# EAGLE board eight envelopes (EAGLE 9.6.2)
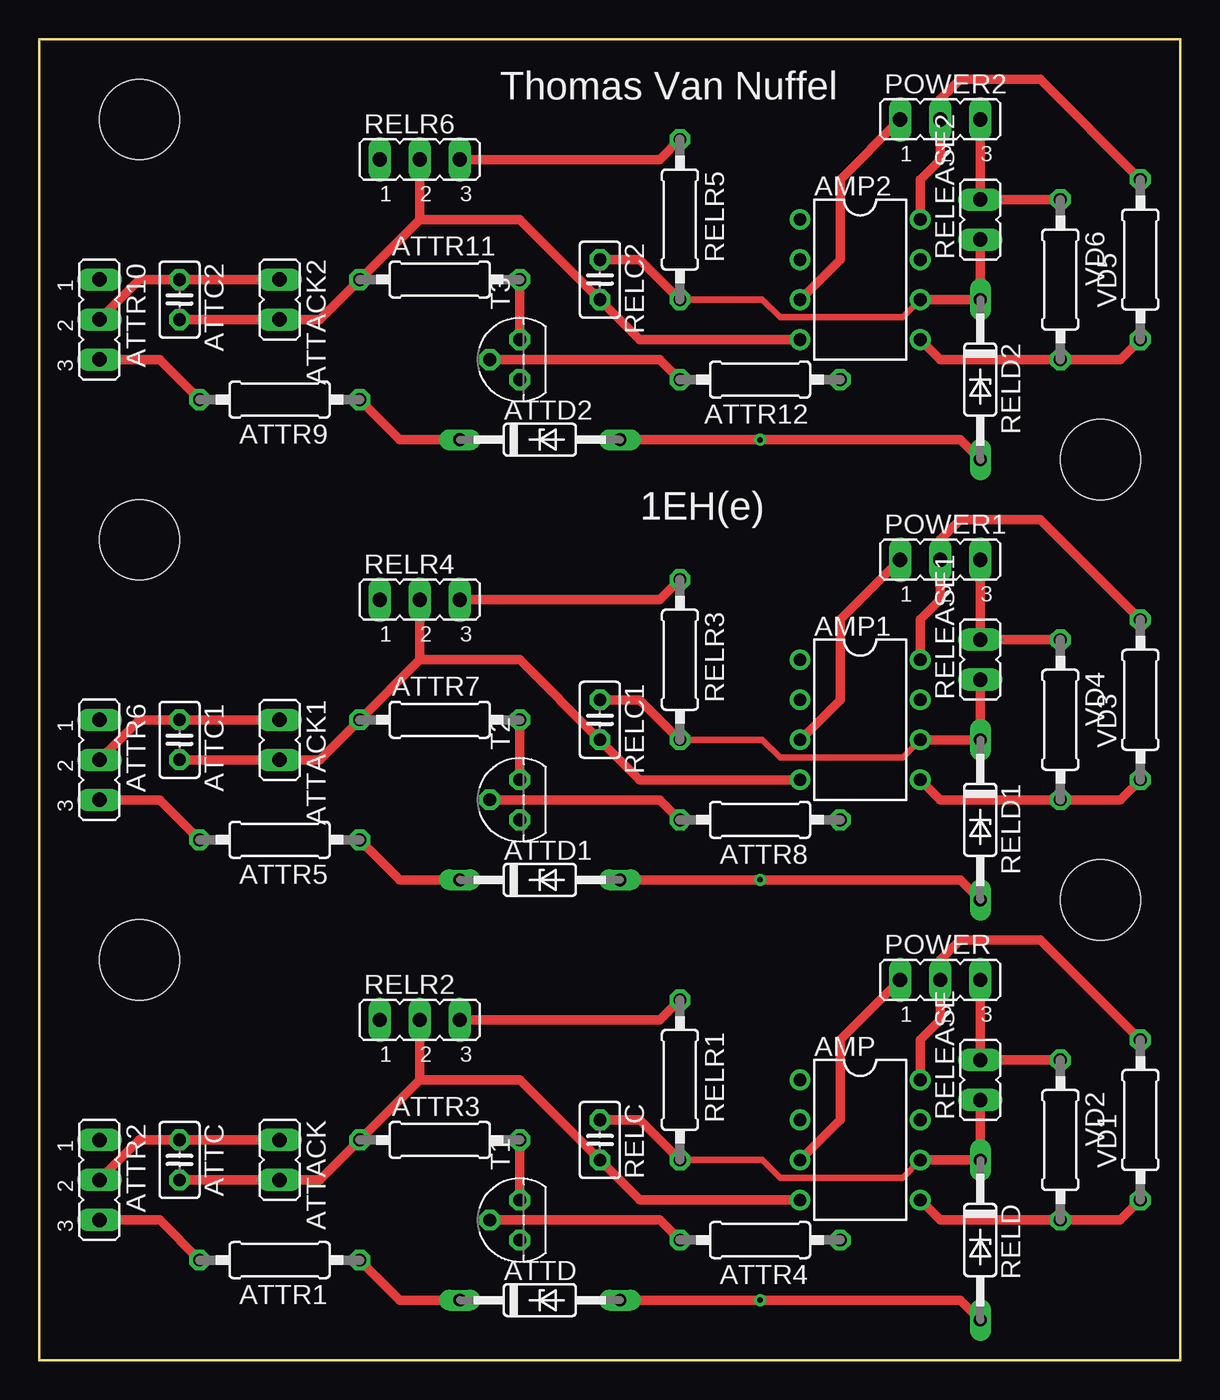
[diagram p0: board, top side]
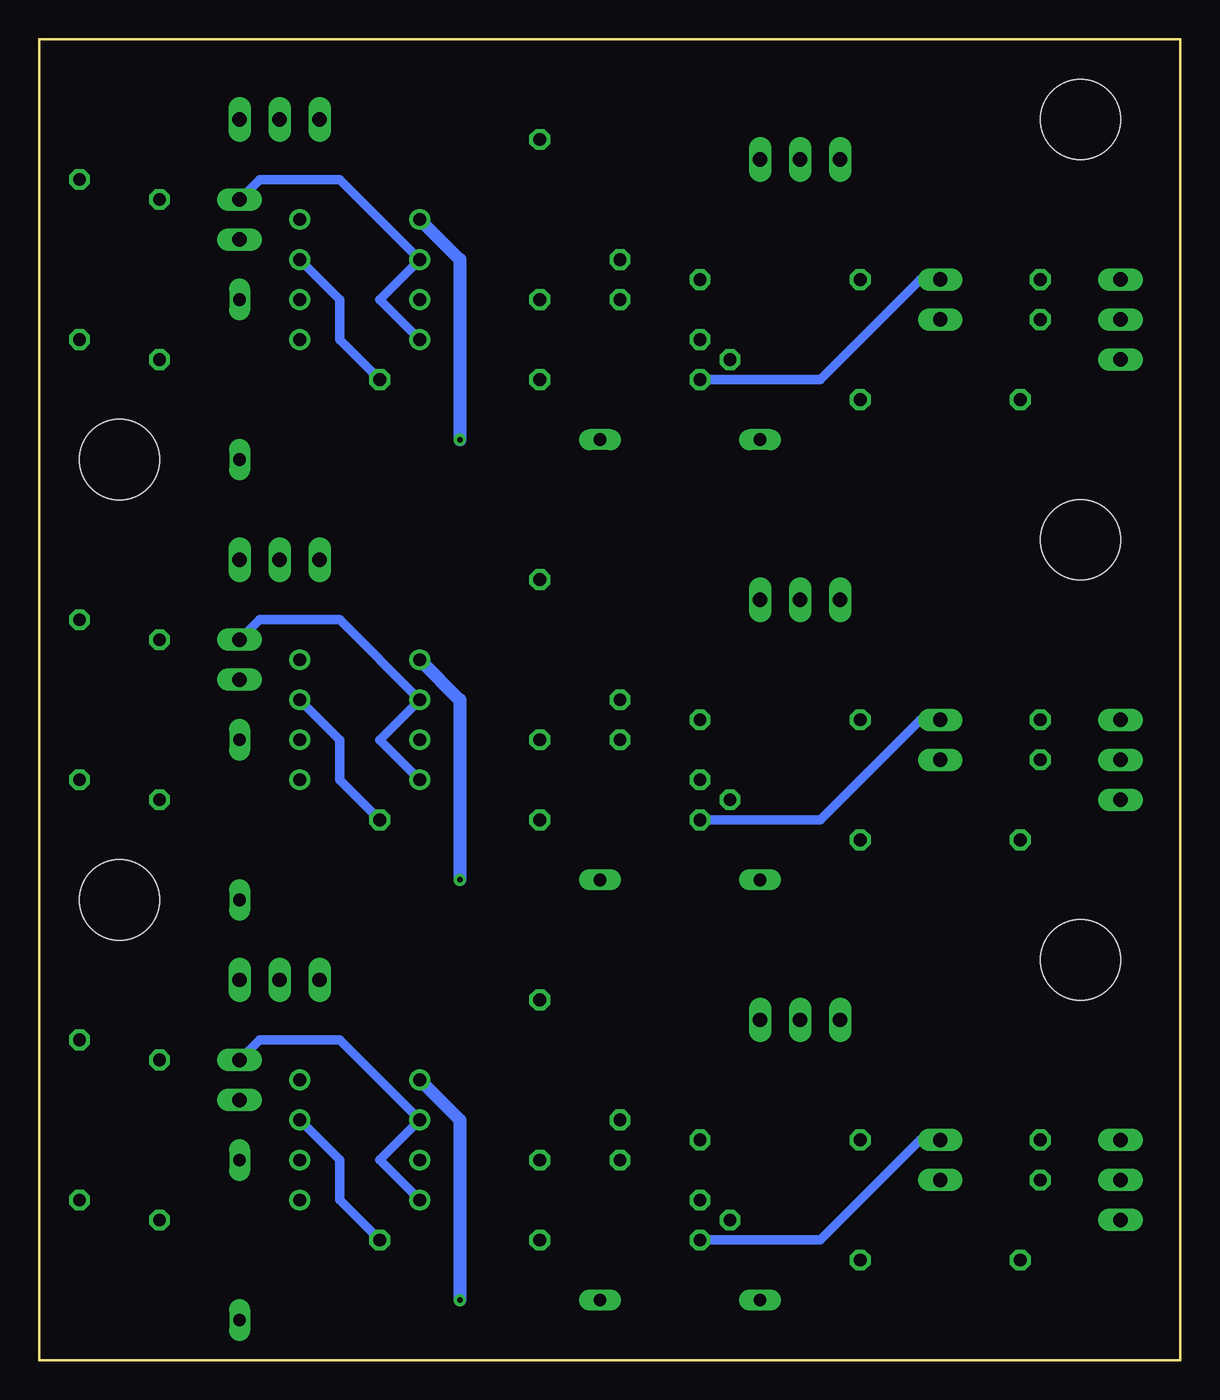
[diagram p1: board, bottom side, seen from below]

Size 72.39 x 83.82 mm. Coordinates in mm from the lower left corner, seen from the top.
Outline: 0,0 72.39,0 72.39,83.82 0,83.82 0,0
Copper layers (1*16): Top 0.035mm / dielectric 1.5mm / Bottom 0.035mm
Design rules "default": minimum track width 6mil, minimum drill 0.35mm, track to track 6mil, track to pad 6mil, pad to pad 6mil, via to via 6mil, smd to smd 6mil, copper to edge 40mil, drill to drill 6mil, minimum pad ring 10mil, minimum via ring 8mil, stop-mask expansion 4mil, vias tented up to drill 0mil, thermal gap 10mil
Holes 5.08 mm at 6.35,78.74 6.35,52.07 6.35,25.4 67.31,57.15 67.31,29.21

## Footprints (pad centres in the part's own frame; a part is rotated, then mirrored left to right if it is on the bottom)
DIL08 = drill 0.813 pad 1.27: 1 -3.81,-3.81; 2 -1.27,-3.81; 3 1.27,-3.81; 4 3.81,-3.81; 5 3.81,3.81; 6 1.27,3.81; 7 -1.27,3.81; 8 -3.81,3.81
JP1 = drill 0.914 long: 1 0,-1.27; 2 0,1.27
C025-025X050 = drill 0.813 octagon: 1 -1.27,0; 2 1.27,0
DO35Z10 = drill 0.813 long: A 5.08,0; C -5.08,0
0207/10 = drill 0.813 octagon: 1 -5.08,0; 2 5.08,0
JP2 = drill 0.914 long: 1 -2.54,0; 2 0,0; 3 2.54,0
TO92 = drill 0.813 octagon: 1 1.27,0; 2 0,1.905; 3 -1.27,0

## Placement (x,y rotation side)
AMP  LM358N  [DIL08]  52.07,13.97 270 top
AMP1  LM358N  [DIL08]  52.07,40.64 270 top
AMP2  LM358N  [DIL08]  52.07,68.58 270 top
ATTACK  [JP1]  15.24,12.7 180 top
ATTACK1  [JP1]  15.24,39.37 180 top
ATTACK2  [JP1]  15.24,67.31 180 top
ATTC  [C025-025X050]  8.89,12.7 270 top
ATTC1  [C025-025X050]  8.89,39.37 270 top
ATTC2  [C025-025X050]  8.89,67.31 270 top
ATTD  1N821  [DO35Z10]  31.75,3.81 0 top
ATTD1  1N821  [DO35Z10]  31.75,30.48 0 top
ATTD2  1N821  [DO35Z10]  31.75,58.42 0 top
ATTR1  [0207/10]  15.24,6.35 180 top
ATTR2  [JP2]  3.81,11.43 270 top
ATTR3  [0207/10]  25.4,13.97 0 top
ATTR4  [0207/10]  45.72,7.62 180 top
ATTR5  [0207/10]  15.24,33.02 180 top
ATTR6  [JP2]  3.81,38.1 270 top
ATTR7  [0207/10]  25.4,40.64 0 top
ATTR8  [0207/10]  45.72,34.29 180 top
ATTR9  [0207/10]  15.24,60.96 180 top
ATTR10  [JP2]  3.81,66.04 270 top
ATTR11  [0207/10]  25.4,68.58 0 top
ATTR12  [0207/10]  45.72,62.23 180 top
POWER  [JP2]  57.15,24.13 0 top
POWER1  [JP2]  57.15,50.8 0 top
POWER2  [JP2]  57.15,78.74 0 top
RELC  [C025-025X050]  35.56,13.97 270 top
RELC1  [C025-025X050]  35.56,40.64 270 top
RELC2  [C025-025X050]  35.56,68.58 270 top
RELD  1N821  [DO35Z10]  59.69,7.62 270 top
RELD1  1N821  [DO35Z10]  59.69,34.29 270 top
RELD2  1N821  [DO35Z10]  59.69,62.23 270 top
RELEASE  [JP1]  59.69,17.78 0 top
RELEASE1  [JP1]  59.69,44.45 0 top
RELEASE2  [JP1]  59.69,72.39 0 top
RELR1  [0207/10]  40.64,17.78 270 top
RELR2  [JP2]  24.13,21.59 0 top
RELR3  [0207/10]  40.64,44.45 270 top
RELR4  [JP2]  24.13,48.26 0 top
RELR5  [0207/10]  40.64,72.39 270 top
RELR6  [JP2]  24.13,76.2 0 top
T1  BC547  [TO92]  30.48,8.89 90 top
T2  BC547  [TO92]  30.48,35.56 90 top
T3  BC547  [TO92]  30.48,63.5 90 top
VD1  [0207/10]  69.85,15.24 90 top
VD2  [0207/10]  64.77,13.97 270 top
VD3  [0207/10]  69.85,41.91 90 top
VD4  [0207/10]  64.77,40.64 270 top
VD5  [0207/10]  69.85,69.85 90 top
VD6  [0207/10]  64.77,68.58 270 top

## Library data of the parts
AMP AMP1 AMP2 = linear
ATTACK ATTACK1 ATTACK2 ATTR2 ATTR6 ATTR10 POWER POWER1 POWER2 RELEASE RELEASE1 RELEASE2 RELR2 RELR4 RELR6 = jumper
ATTC ATTC1 ATTC2 RELC RELC1 RELC2 = rcl; SPICEPREFIX: C
ATTD ATTD1 ATTD2 RELD RELD1 RELD2 = diode
ATTR1 ATTR3-ATTR5 ATTR7-ATTR9 ATTR11 ATTR12 RELR1 RELR3 RELR5 VD1-VD6 = rcl; SPICEPREFIX: R
T1-T3 = transistor

## Nets
GND: AMP.2 AMP.4 ATTACK.2 ATTC.2 ATTR3.1 POWER.3 RELC.2 RELEASE.2 RELR2.2 VD2.1
GND1: AMP1.2 AMP1.4 ATTACK1.2 ATTC1.2 ATTR7.1 POWER1.3 RELC1.2 RELEASE1.2 RELR4.2 VD4.1
GND2: AMP2.2 AMP2.4 ATTACK2.2 ATTC2.2 ATTR11.1 POWER2.3 RELC2.2 RELEASE2.2 RELR6.2 VD6.1
N$1: AMP.5 VD1.1 VD2.2
N$2: AMP.7 ATTR4.1
N$3: ATTR4.2 T1.2
N$4: ATTR1.2 ATTR2.3
N$5: ATTR3.2 T1.1
N$6: ATTACK.1 ATTC.1 ATTR2.2 T1.3
N$7: ATTD.C ATTR1.1
N$8: AMP.1 ATTD.A RELD.A
N$9: AMP.8 POWER.2 VD1.2
N$10: AMP.3 POWER.1
N$11: AMP.6 RELC.1 RELD.C RELEASE.1 RELR1.2
N$12: RELR1.1 RELR2.3
N$13: AMP1.5 VD3.1 VD4.2
N$14: AMP1.7 ATTR8.1
N$15: ATTR8.2 T2.2
N$16: ATTR7.2 T2.1
N$17: ATTACK1.1 ATTC1.1 ATTR6.2 T2.3
N$18: ATTD1.C ATTR5.1
N$19: ATTR5.2 ATTR6.3
N$20: AMP1.1 ATTD1.A RELD1.A
N$21: AMP1.8 POWER1.2 VD3.2
N$22: AMP1.6 RELC1.1 RELD1.C RELEASE1.1 RELR3.2
N$23: AMP1.3 POWER1.1
N$24: RELR3.1 RELR4.3
N$25: AMP2.5 VD5.1 VD6.2
N$26: AMP2.7 ATTR12.1
N$27: ATTR12.2 T3.2
N$28: ATTR11.2 T3.1
N$29: ATTACK2.1 ATTC2.1 ATTR10.2 T3.3
N$30: ATTD2.C ATTR9.1
N$31: ATTR9.2 ATTR10.3
N$32: AMP2.1 ATTD2.A RELD2.A
N$33: AMP2.8 POWER2.2 VD5.2
N$34: AMP2.6 RELC2.1 RELD2.C RELEASE2.1 RELR5.2
N$35: AMP2.3 POWER2.1
N$36: RELR5.1 RELR6.3

## Tracks (layer width: path | path; a pad name or v marks a point on that pad's centre or on a via)
GND
  Top 0.61: ATTC.2 ATTACK.2 17.78,11.43 ATTR3.1 24.13,17.78 | 24.13,17.78 RELR2.2 | AMP.4 38.1,10.16 RELC.2 30.48,17.78 24.13,17.78 | VD2.1 RELEASE.2 POWER.3
  Bottom 0.61: RELEASE.2 58.42,20.32 53.34,20.32 AMP.2 50.8,12.7 AMP.4
GND1
  Top 0.61: ATTC1.2 ATTACK1.2 17.78,38.1 ATTR7.1 24.13,44.45 | 24.13,44.45 RELR4.2 | AMP1.4 38.1,36.83 RELC1.2 30.48,44.45 24.13,44.45 | VD4.1 RELEASE1.2 POWER1.3
  Bottom 0.61: RELEASE1.2 58.42,46.99 53.34,46.99 AMP1.2 50.8,39.37 AMP1.4
GND2
  Top 0.61: ATTC2.2 ATTACK2.2 17.78,66.04 ATTR11.1 24.13,72.39 | 24.13,72.39 RELR6.2 | AMP2.4 38.1,64.77 RELC2.2 30.48,72.39 24.13,72.39 | VD6.1 RELEASE2.2 POWER2.3
  Bottom 0.61: RELEASE2.2 58.42,74.93 53.34,74.93 AMP2.2 50.8,67.31 AMP2.4
N$1
  Top 0.61: AMP.5 57.15,8.89 VD2.2 68.58,8.89 VD1.1
N$2
  Bottom 0.61: ATTR4.1 53.34,10.16 53.34,12.7 AMP.7
N$3
  Top 0.61: T1.2 39.37,8.89 ATTR4.2
N$4
  Top 0.61: ATTR1.2 7.62,8.89 ATTR2.3
N$5
  Top 0.61: T1.1 ATTR3.2
N$6
  Top 0.61: ATTR2.2 6.35,13.97 ATTC.1 ATTACK.1
  Bottom 0.61: T1.3 22.86,7.62 16.51,13.97 ATTACK.1
N$7
  Top 0.61: ATTD.C 22.86,3.81 ATTR1.1
N$8  (via drill 0.35)
  Top 0.152: v45.72,3.81 45.77,3.86 45.77,3.81
  Top 0.61: ATTD.A v45.72,3.81 45.77,3.81 58.42,3.81 RELD.A
  Bottom 0.813: AMP.1 45.72,15.24 v45.72,3.81
N$9
  Top 0.61: VD1.2 63.5,26.67 58.42,26.67 57.15,25.4 POWER.2 57.15,21.59 55.88,20.32 AMP.8
N$10
  Top 0.61: POWER.1 50.8,20.32 50.8,15.24 AMP.3
N$11
  Top 0.406: RELR1.2 45.87,12.7 46.99,11.58 54.76,11.58 AMP.6
  Top 0.61: RELC.1 38.1,15.24 RELR1.2 | RELEASE.1 RELD.C AMP.6
N$12
  Top 0.61: RELR2.3 39.37,21.59 RELR1.1
N$13
  Top 0.61: AMP1.5 57.15,35.56 VD4.2 68.58,35.56 VD3.1
N$14
  Bottom 0.61: ATTR8.1 53.34,36.83 53.34,39.37 AMP1.7
N$15
  Top 0.61: T2.2 39.37,35.56 ATTR8.2
N$16
  Top 0.61: T2.1 ATTR7.2
N$17
  Top 0.61: ATTR6.2 6.35,40.64 ATTC1.1 ATTACK1.1
  Bottom 0.61: T2.3 22.86,34.29 16.51,40.64 ATTACK1.1
N$18
  Top 0.61: ATTD1.C 22.86,30.48 ATTR5.1
N$19
  Top 0.61: ATTR5.2 7.62,35.56 ATTR6.3
N$20  (via drill 0.35)
  Top 0.152: v45.72,30.48 45.77,30.53 45.77,30.48
  Top 0.61: ATTD1.A v45.72,30.48 45.77,30.48 58.42,30.48 RELD1.A
  Bottom 0.813: AMP1.1 45.72,41.91 v45.72,30.48
N$21
  Top 0.61: VD3.2 63.5,53.34 58.42,53.34 57.15,52.07 POWER1.2 57.15,48.26 55.88,46.99 AMP1.8
N$22
  Top 0.406: RELR3.2 45.87,39.37 46.99,38.25 54.76,38.25 AMP1.6
  Top 0.61: RELC1.1 38.1,41.91 RELR3.2 | RELEASE1.1 RELD1.C AMP1.6
N$23
  Top 0.61: POWER1.1 50.8,46.99 50.8,41.91 AMP1.3
N$24
  Top 0.61: RELR4.3 39.37,48.26 RELR3.1
N$25
  Top 0.61: AMP2.5 57.15,63.5 VD6.2 68.58,63.5 VD5.1
N$26
  Bottom 0.61: ATTR12.1 53.34,64.77 53.34,67.31 AMP2.7
N$27
  Top 0.61: T3.2 39.37,63.5 ATTR12.2
N$28
  Top 0.61: T3.1 ATTR11.2
N$29
  Top 0.61: ATTR10.2 6.35,68.58 ATTC2.1 ATTACK2.1
  Bottom 0.61: T3.3 22.86,62.23 16.51,68.58 ATTACK2.1
N$30
  Top 0.61: ATTD2.C 22.86,58.42 ATTR9.1
N$31
  Top 0.61: ATTR9.2 7.62,63.5 ATTR10.3
N$32  (via drill 0.35)
  Top 0.152: v45.72,58.42 45.77,58.47 45.77,58.42
  Top 0.61: ATTD2.A v45.72,58.42 45.77,58.42 58.42,58.42 RELD2.A
  Bottom 0.813: AMP2.1 45.72,69.85 v45.72,58.42
N$33
  Top 0.61: VD5.2 63.5,81.28 58.42,81.28 57.15,80.01 POWER2.2 57.15,76.2 55.88,74.93 AMP2.8
N$34
  Top 0.406: RELR5.2 45.87,67.31 46.99,66.19 54.76,66.19 AMP2.6
  Top 0.61: RELC2.1 38.1,69.85 RELR5.2 | RELEASE2.1 RELD2.C AMP2.6
N$35
  Top 0.61: POWER2.1 50.8,74.93 50.8,69.85 AMP2.3
N$36
  Top 0.61: RELR6.3 39.37,76.2 RELR5.1

## Text on the board
tPlace: Thomas Van Nuffel | 1EH(e)